# Altium PCB DigitalClock.PcbDoc
Units mil, origin at the board's own origin, x right, y up, seen from the top; angles counter-clockwise.
Board outline 6000 x 4000 mil, 2 copper layers (Top Layer, Bottom Layer); 37 components, 67 nets, 227 pads, 3 vias.
Unrouted connection lines stored in the file: 130.
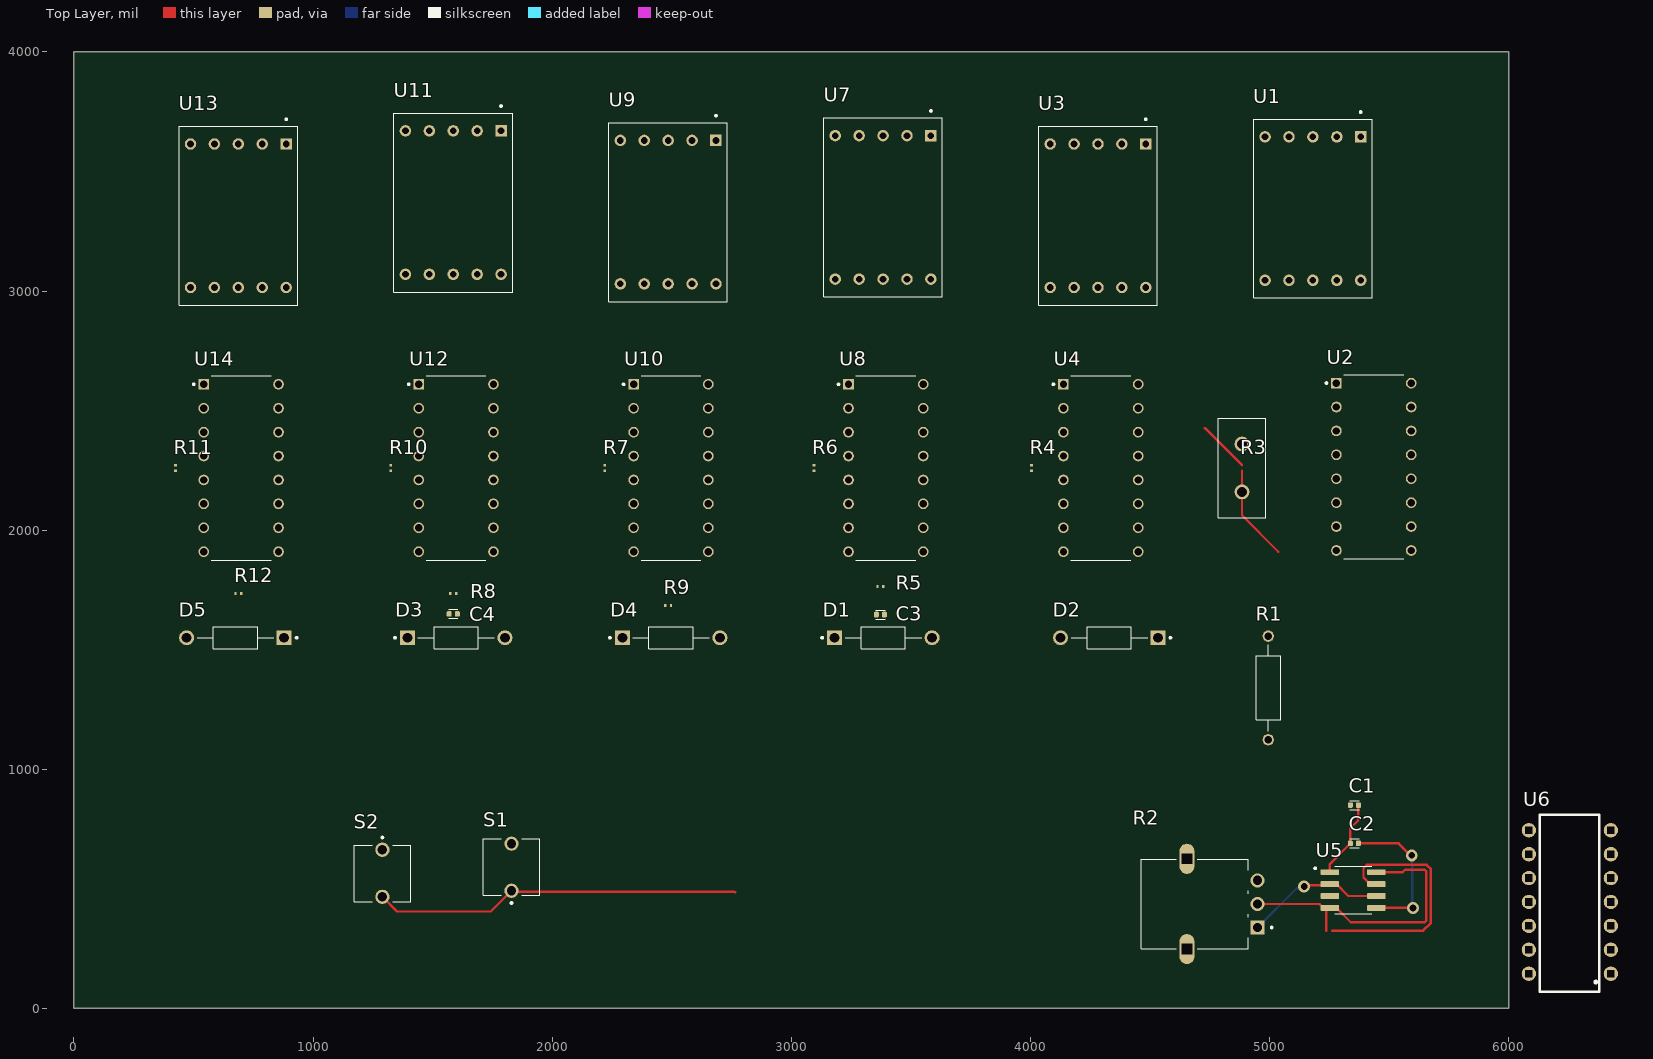
[diagram p0: Top Layer view]
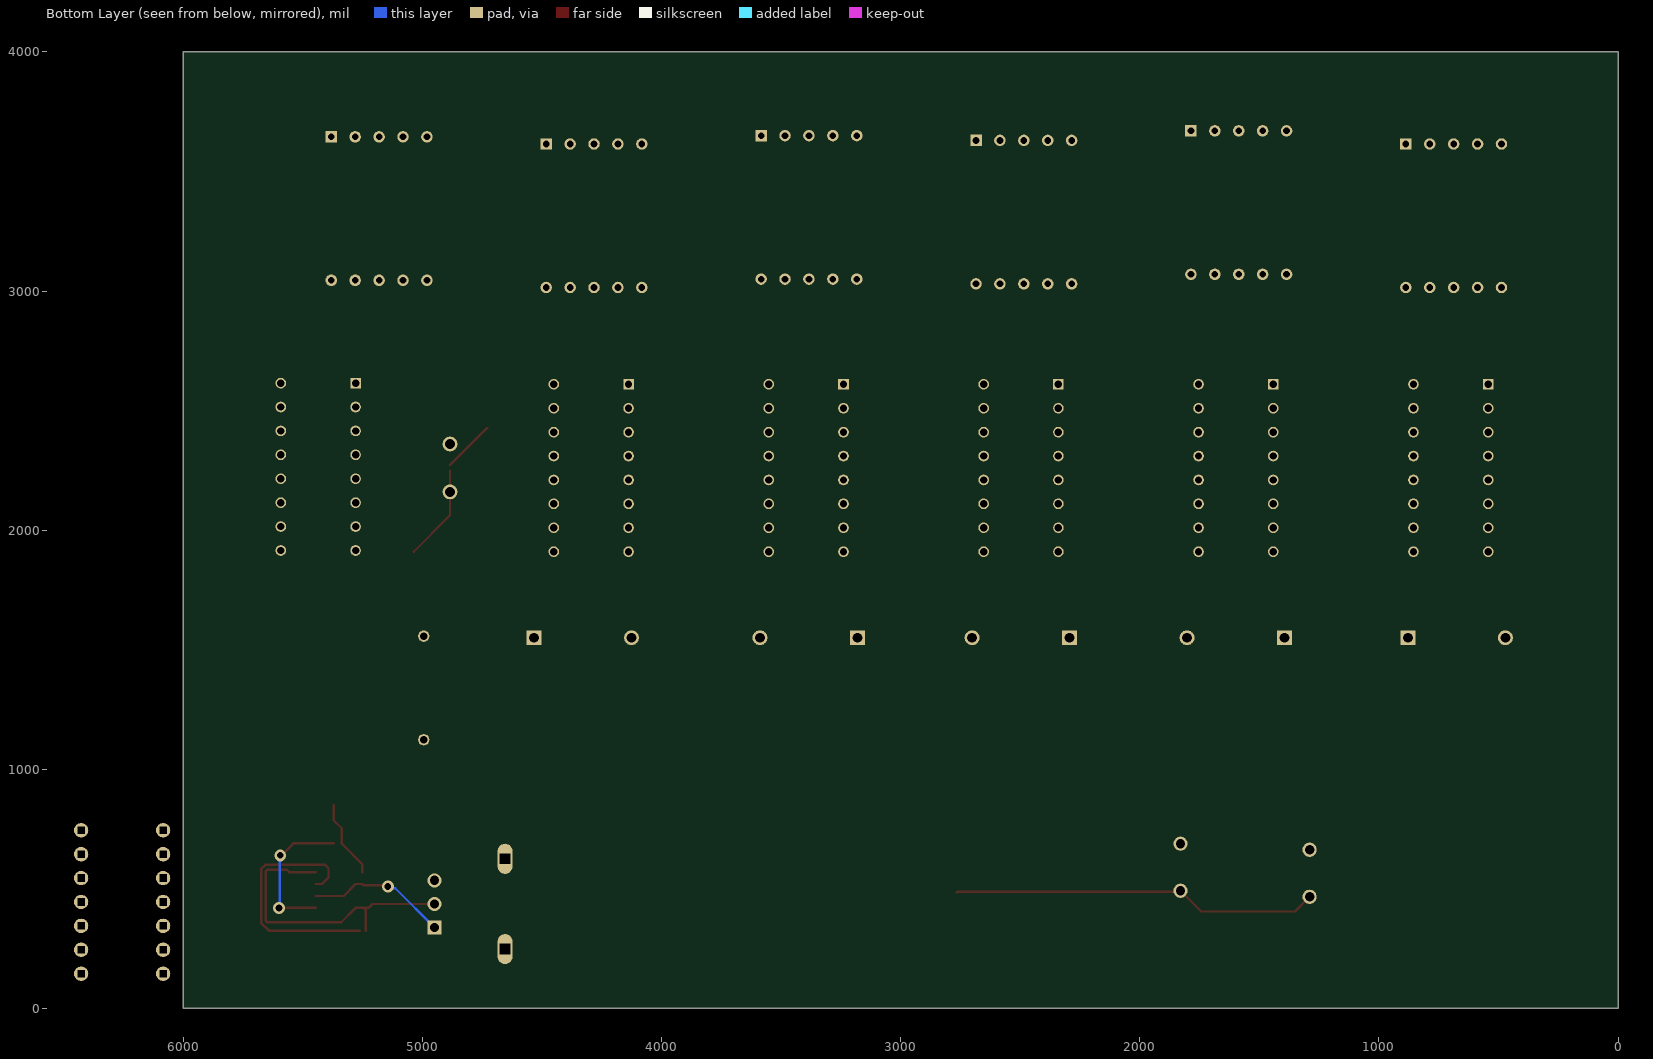
[diagram p1: Bottom Layer view, seen from below]

## Layer stack, top to bottom
Top Solder: solder mask 0.4, Solder Resist, Dk 3.5
Top Layer: signal copper 1.4
Dielectric 1: dielectric 12.6, FR-4, Dk 4.8
Bottom Layer: signal copper 1.4
Bottom Solder: solder mask 0.4, Solder Resist, Dk 3.5

## Board outline
0,0 6000,0 6000,4000 0,4000

## Design rules (kind name [scope] priority, off if disabled: settings)
Clearance [All] p1: gap=10 ignorepadtopadclearanceinfootprint=FALSE
Height [All] p1: minheight=0 maxheight=1200 prefheight=500
PolygonConnect [All] p1: connectstyle=Relief reliefconductorwidth=10 reliefentries=4 polygonreliefangle="90 Angle" airgapwidth=10
RoutingVias [All] p1: holewidth=28 width=50 viastyle="Through Hole" minholewidth=28 minwidth=50 maxholewidth=28 maxwidth=50
SolderMaskExpansion [All] p1: expansion=4 istentingtop=FALSE
SupplyNets "Schematic Supply Nets_1" [InNet('+5')] p1: voltage=0.000
SupplyNets "Schematic Supply Nets" [InNet('GND')] p2: voltage=0.000
Width [All] p1: maxlimit=10 minlimit=10 preferedwidth=10
29 further rules are at their usual default settings.

## Components (designator, comment, footprint, x,y, rotation, side; value= is the part's Value field where it differs from the comment)
C1 "10uF" CAPC1005X55N 5355,850 r180 top
C2 "100nF" CAPC1005X55N 5355,690 r0 top
C3 "1" CAPC1005X55N 3372.73,1647.06 r0 top
C4 "1F" CAPC1005X55N 1586.36,1650 r0 top
D1 "1N5819RL" DIOAD1036W78L470D235 3385,1550 r0 top
D2 "1N5819RL" DIOAD1036W78L470D235 4330,1550 r180 top
D3 "1N5819RL" DIOAD1036W78L470D235 1598.63,1550 r0 top
D4 "1N5819RL" DIOAD1036W78L470D235 2497.43,1550 r0 top
D5 "1N5819RL" DIOAD1036W78L470D235 675.28,1550 r180 top
R1 "1K" RESAD1100W55L680D260 4995,1340 r90 top
R2 "100K" POT_RD901F-40-15R1-B100K-00DL1 4654.72,436.57 r180 top
R3 "470" TO508P1060X500X1900-2 4885,2260 r270 top
R4 "470" RES_ERJU01J683C 4005,2260 r90 top
R5 "10K" RES_ERJU01J683C 3372.73,1765 r0 top
R6 "470" RES_ERJU01J683C 3095,2260 r90 top
R7 "470" RES_ERJU01J683C 2220,2260 r90 top
R8 "10K" RES_ERJU01J683C 1586.36,1735 r0 top
R9 "10K" RES_ERJU01J683C 2485.16,1685 r0 top
R10 "470" RES_ERJU01J683C 1325,2260 r270 top
R11 "470" RES_ERJU01J683C 425,2260 r90 top
R12 "10K" RES_ERJU01J683C 687.55,1735 r180 top
S1 "BUTT-2" SW_BUTT-2 1830,590.37 r90 top
S2 "BUTT-2" SW_BUTT-2 1290,565 r270 top
U1 "LDSC512RI" LED_LDSC512RI 5181.58,3345 r270 top
U2 "4026" DIP794W45P254L1969H508Q16 5436.3,2265 r0 top
U3 "LDSC512RI" LED_LDSC512RI 4282.78,3315 r270 top
U4 "4026" DIP794W45P254L1969H508Q16 4294.56,2260 r0 top
U5 "555Timer" SOIC127P599X175-8N 5350,495 r0 top
U6 "7411" "IC 7411" 6255,440 r90 top
U7 "LDSC512RI" LED_LDSC512RI 3383.97,3350 r270 top
U8 "4026" DIP794W45P254L1969H508Q16 3395.75,2260 r0 top
U9 "LDSC512RI" LED_LDSC512RI 2485.16,3330 r270 top
U10 "4026" DIP794W45P254L1969H508Q16 2496.94,2260 r0 top
U11 "LDSC512RI" LED_LDSC512RI 1586.36,3370 r270 top
U12 "4026" DIP794W45P254L1969H508Q16 1598.14,2260 r0 top
U13 "LDSC512RI" LED_LDSC512RI 687.55,3315 r270 top
U14 "4026" DIP794W45P254L1969H508Q16 699.33,2260 r0 top

## Footprints (in the part's own frame and the unit in brackets; to place one, negate y for a bottom-side part, rotate by r counter-clockwise, add the part's x,y. Pads: shape width x height; smd on the part's side, far side on the other; paste and mask are expansions set on the pad)
CAPC1005X55N [mm]
  rrect53% 0.54x0.6 smd: 1(-0.43,0) 2(0.43,0)
  silkscreen extent -0.5,-0.48 0.5,0.48
DIOAD1036W78L470D235 [mm]
  round 1.59 hole 1.06: A(5.18,0)
  rect 1.59x1.59 hole 1.06: C(-5.18,0)
  silkscreen extent -6.6,-1.17 4.07,1.17, body extent -1.17,-1.17 1.17,1.17, height 27.72
DIP794W45P254L1969H508Q16 [mm]
  rect 1.13x1.13 hole 0.78: 1(-3.97,8.89)
  round 1.13 hole 0.78: 2(-3.97,6.35) 3(-3.97,3.81) 4(-3.97,1.27) 5(-3.97,-1.27) 6(-3.97,-3.81) 7(-3.97,-6.35) 8(-3.97,-8.89) 9(3.97,-8.89) 10(3.97,-6.35) 11(3.97,-3.81) 12(3.97,-1.27) 13(3.97,1.27) 14(3.97,3.81) 15(3.97,6.35) 16(3.97,8.89)
  silkscreen extent -5.13,-9.77 3.17,9.77
"IC 7411" [mil] "Three Input AND Gate"
  round 60 hole 30 square: 1(-295.07,-172.88) 2(-195.07,-172.88) 3(-95.07,-172.88) 4(4.93,-172.88) 5(104.93,-172.88) 6(204.93,-172.88) 7(304.93,-172.88) 8(304.93,170.11) 9(204.93,170.11) 10(104.93,170.11) 11(4.93,170.11) 12(-95.07,170.11) 13(-195.07,170.11) 14(-295.07,170.11)
  silkscreen extent -370,-125 370,125
LED_LDSC512RI [mm]
  rect 1.218x1.218 / inner round 1.218 / far side rect 1.218x1.218 hole 0.71: 1(-7.62,5.08)
  round 1.218 hole 0.71: 2(-7.62,2.54) 3(-7.62,0) 4(-7.62,-2.54) 5(-7.62,-5.08) 6(7.62,-5.08) 7(7.62,-2.54) 8(7.62,0) 9(7.62,2.54) 10(7.62,5.08)
  silkscreen extent -10.35,-6.3 9.5,6.3, body extent -9.5,-6.3 9.5,6.3, height 8
POT_RD901F-40-15R1-B100K-00DL1 [mm]
  rect 1.508x1.508 / inner round 1.508 / far side rect 1.508x1.508 hole 1: 1(-7.5,2.5)
  round 1.508 hole 1: 2(-7.5,0) 3(-7.5,-2.5)
  oval 1.6x3.2 hole 1.1 square: SH1(0,4.8) SH2(0,-4.8)
  silkscreen extent -9.1,-4.75 4.85,4.75, body extent -6,-7.65 6,6, height 25
RES_ERJU01J683C [mm]
  rect 0.25x0.3 smd: 1(-0.3,0) 2(0.3,0)
RESAD1100W55L680D260 [mm]
  round 1.2 hole 0.8: 1(-5.5,0) 2(5.5,0)
  silkscreen extent -4.58,-1.3 4.58,1.3
SOIC127P599X175-8N [mm]
  rrect25% 1.97x0.6 smd: 1(-2.47,1.905) 2(-2.47,0.635) 3(-2.47,-0.635) 4(-2.47,-1.905) 5(2.47,-1.905) 6(2.47,-0.635) 7(2.47,0.635) 8(2.47,1.905)
  silkscreen extent -4.14,-2.52 1.95,2.52
SW_BUTT-2 [mm]
  round 1.508 hole 1: 1(-2.5,0) 2(2.5,0)
  silkscreen extent -3.9,-3 3,3
TO508P1060X500X1900-2 [mm]
  round 1.575 hole 1.05: 1(-2.54,0) 2(2.54,0)
  silkscreen extent -5.3,-2.5 5.3,2.5

## Part data
C1 C2 C3 C4: library part C0402H102J5GACTU, "CAPACITOR, NP0, 0402, 50V, 1NF; Capacitance:1000pF; Capacitance Tolerance:Â± 5%; Dielectric Characteristic:C0G / NP0; Voltage Rating:50V; Capacitor Case Style:0402; Operating Temperature Range:-55Â°C to +200Â°C; SVHC:No SVHC (19-Dec-2011); Capacitor Mounting:SMD", Package=None, Availability=Unavailable, MP=C0402H102J5GACTU, Price=None
D1 D2 D3 D4 D5: "Diode Schottky 40 V 1A Through Hole Axial", Package="DO-41-2 ON Semiconductor", Availability="In Stock", Check_prices=https://www.snapeda.com/parts/1N5819RL/Onsemi/view-part/?ref=eda, MF="ON Semiconductor", MP=1N5819RL, Price=None, SnapEDA_Link=https://www.snapeda.com/parts/1N5819RL/Onsemi/view-part/?ref=snap
R1 R3 R4 R5 R6 R7 R8 R9 R10 R11 R12: library part ERJU01J683C, Package=None, Availability=Unavailable, MP=ERJU01J683C, Price=None
R2: library part RD901F-40-15R1-B100K-00DL1, "Potentiometers 9mm Linear 100K Round Shaft", Package=None, Check_prices=https://www.snapeda.com/parts/RD901F-40-15R1-B100K-00DL1/Alpha+Taiwan/view-part/?ref=eda, MF="Alpha (Taiwan)", MP=RD901F-40-15R1-B100K-00DL1, SnapEDA_Link=https://www.snapeda.com/parts/RD901F-40-15R1-B100K-00DL1/Alpha+Taiwan/view-part/?ref=snap
S1 S2: "Tactile Switches MINI PUSH BUTTON SWITCH 2-PIN QTY. 4", Package=None, Availability="In Stock", Check_prices=https://www.snapeda.com/parts/BUTT-2/Gravitech/view-part/?ref=eda, MF=Gravitech, MP=BUTT-2, Price=None, Purchase-URL=https://pricing.snapeda.com/search/part/BUTT-2/?ref=eda, SnapEDA_Link=https://www.snapeda.com/parts/BUTT-2/Gravitech/view-part/?ref=snap
U1 U3 U7 U9 U11 U13: "DISPLAY, 7 SEGMENT, 14.2MM, GREEN; LED Colour:Green; Forward Current If:10mA; Forward Voltage:2.2V; Luminous Intensity:3.5mcd; No. of Digits / Alpha:1; Character Size:14.2mm; Common Connection:Common Cathode; Product Range:-; SVHC:No SVHC (27-Jun-2018)", Package="DIP-10 Lumex", Check_prices=https://www.snapeda.com/parts/LDSC512RI/Lumex/view-part/?ref=eda, MF="Lumex Optoelectronics", MP=LDSC512RI, SnapEDA_Link=https://www.snapeda.com/parts/LDSC512RI/Lumex/view-part/?ref=snap
U2 U4 U8 U10 U12 U14: library part CD4026BE, "CMOS Decade Counter/Divider with Decoded 7-Segment Display Outputs and Display Enable 16-PDIP -55 to 125", Package="PDIP-16 Texas Instruments", Availability=Good, DigiKey-Purchase-URL=https://snapeda.com/shop?store=DigiKey&id=779031, MF="Texas Instruments", Mouser-Purchase-URL=https://snapeda.com/shop?store=Mouser&id=779031, MP=CD4026BE, Price=None, SnapEDA_Link=https://www.snapeda.com/parts/CD4026BE/Texas%20Instruments/view-part/779031/?ref=snap, Texas_Instruments-Purchase-URL=https://snapeda.com/shop?store=Texas+Instruments&id=779031
U5: library part LMC555CM/NOPB, "Worlds smallest 555 timer with low power, high accuracy and a Fmax of 3MHz 8-SOIC -40 to 85", Package="SOIC-8 Texas Instruments", Availability=Unavailable, BuyPart=https://www.snapeda.com/parts/LMC555CM/NOPB/Texas%20Instruments/view-part/7189/?ref=eda, MF="Texas Instruments", MP=LMC555CM/NOPB, Price=None, SnapEDA_Link=https://www.snapeda.com/parts/LMC555CM/NOPB/Texas%20Instruments/view-part/7189/?ref=snap, Texas_Instruments-Purchase-URL=https://snapeda.com/shop?store=Texas+Instruments&id=7189
U6: "Three Input AND Gate"

## Via types
v1: diameter 50, hole 28, Top Layer to Bottom Layer, 3 vias

## Nets (pads, with @x,y where several pads share a name; then routed paths per layer and width w, separated by ;. In a path a pad name is that pad's centre, name@x,y a point inside that pad or via, vN(x,y) a via of type N, cw(c..) or ccw(c..) an arc to the next point about the centre after c; other vN are vias at no path point)
+5: R1.2 R2.2 S1.1 S2.2 U2.3 U2.16 U4.3 U4.16 U5.4 U5.8 U6.14 U8.3 U8.16 U10.3 U10.16 U12.3 U12.16 U14.3 U14.16 | length 2799
  Top Layer w10: S2.2 1351.57,405 1743.06,405 S1.1 1833.47,488.47 2761.53,488.47 2765,485 ; R2.2 5209.21,436.57 5225.79,420 U5.4@5245,420 ; 5238.19,325 5238.19,413.19 U5.4@5245,420 ; U5.8 5556.68,570 5566.68,580 5649.14,580 5655,574.14 5655,365.86 5649.14,360 5339.72,360 5279.72,420 U5.4 U5.4@5245,420
GND: C1.1 C2.1 R3.2 R4.2 R5.1 R6.2 R7.2 R8.2 R9.2 R10.2 R11.2 R12.2 U2.2 U2.8 U2.15 U4.2 U4.8 U5.1 U6.7 U8.2 U8.8 U8.15 U10.2 U10.8 U12.2 U12.8 U14.2 U14.8 | length 730.5
  Top Layer w10: 4885,2248.19 4885,2062.06 5037.06,1910 ; U5.1 5252.76,603.5 5338.07,688.82 C2.1 5338.07,753.07 5371.93,786.93 C1.1
HOUR_CO: U12.5 U14.1
HOUR_D: U6.1 U13.2 U14.9
HOUR_E: U6.2 U13.1 U14.11
HOUR_F: U6.13 U11.9 U12.6
HOUR_O/P: D5.A U6.12
MIN_CO: U8.5 U10.1
MIN_E: U6.3 U9.10 U10.7
MIN_F: U6.4 U9.9 U10.6
MIN_G: U6.5 U9.1 U10.11
MIN_O/P: D4.A U6.6
NetC1_2: C1.2 R2.1 U5.2 U5.6 | length 593.3
  Top Layer w10: v1(5145,510) 5150,515 5247.76,515 U5.2 5279.72,520 5329.72,470 U5.6
  Bottom Layer w10: R2.1 5114.2,502.35 5137.35,502.35 v1(5145,510)
NetC2_2: C2.2 U5.5 | length 618.6
  Top Layer w10: C2.2 5540,690 5590,640 v1(5595,640) ; U5.5 v1(5600,420)
  Bottom Layer w10: v1(5595,640) 5597.5,637.5 5597.5,422.5 v1(5600,420)
NetC3_1: C3.1 R5.2 S1.2
NetC3_2: C3.2 D1.C U8.1
NetC4_1: C4.1 R8.1 S2.1
NetC4_2: C4.2 D3.C U12.1
NetD1_A: D1.A D2.C U4.15
NetD3_A: D3.A D4.C R9.1 U10.15
NetD5_C: D5.C R12.1 U12.15 U14.15
NetR1_1: R1.1 R2.3 U5.7 | length 1051.2
  Top Layer w10: 5261.81,325.83 5261.81,325 5642.43,325 5675,357.57 5675,582.43 5657.43,600 5407.17,600 5393.46,586.29 5393.46,546.81 5420.28,520 U5.7
NetR3_1: R3.1 U1.3 U1.8 | length 219.2
  Top Layer w10: 4730,2426.81 4885,2271.81
NetR4_1: R4.1 U3.3 U3.8
NetR6_1: R6.1 U7.3 U7.8
NetR7_1: R7.1 U9.3 U9.8
NetR10_1: R10.1 U11.3 U11.8
NetR11_1: R11.1 U13.3 U13.8
NetU1_1: U1.1 U2.11
NetU1_2: U1.2 U2.9
NetU1_4: U1.4 U2.13
NetU1_6: U1.6 U2.12
NetU1_7: U1.7 U2.10
NetU1_9: U1.9 U2.6
NetU1_10: U1.10 U2.7
NetU2_1: U2.1 U5.3
NetU3_2: U3.2 U4.9
NetU3_4: U3.4 U4.13
NetU3_6: U3.6 U4.12
NetU3_7: U3.7 U4.10
NetU7_1: U7.1 U8.11
NetU7_2: U7.2 U8.9
NetU7_4: U7.4 U8.13
NetU7_6: U7.6 U8.12
NetU7_7: U7.7 U8.10
NetU7_9: U7.9 U8.6
NetU7_10: U7.10 U8.7
NetU9_2: U9.2 U10.9
NetU9_4: U9.4 U10.13
NetU9_6: U9.6 U10.12
NetU9_7: U9.7 U10.10
NetU11_1: U11.1 U12.11
NetU11_2: U11.2 U12.9
NetU11_4: U11.4 U12.13
NetU11_6: U11.6 U12.12
NetU11_7: U11.7 U12.10
NetU11_10: U11.10 U12.7
NetU13_4: U13.4 U14.13
NetU13_6: U13.6 U14.12
NetU13_7: U13.7 U14.10
NetU13_9: U13.9 U14.6
NetU13_10: U13.10 U14.7
SEC_CO: U2.5 U4.1
SEC_E: U3.1 U4.11 U6.9
SEC_F: U3.9 U4.6 U6.10
SEC_G: U3.10 U4.7 U6.11
SEC_O/P: D2.A U6.8
pads on no net: R2.SH1 R2.SH2 U1.5 U2.4 U2.14 U3.5 U4.4 U4.5 U4.14 U7.5 U8.4 U8.14 U9.5 U10.4 U10.5 U10.14 U11.5 U12.4 U12.14 U13.5 U14.4 U14.5 U14.14